# Altium PCB Air724UG_Air723UG.PcbDoc
Units mil, origin at the board's own origin, x right, y up, seen from the top; angles counter-clockwise.
Board outline 6000 x 4000 mil, 2 copper layers (Top, Bottom), stack 12.7 mil thick; 2 components, 0 nets, 234 pads, 0 vias.
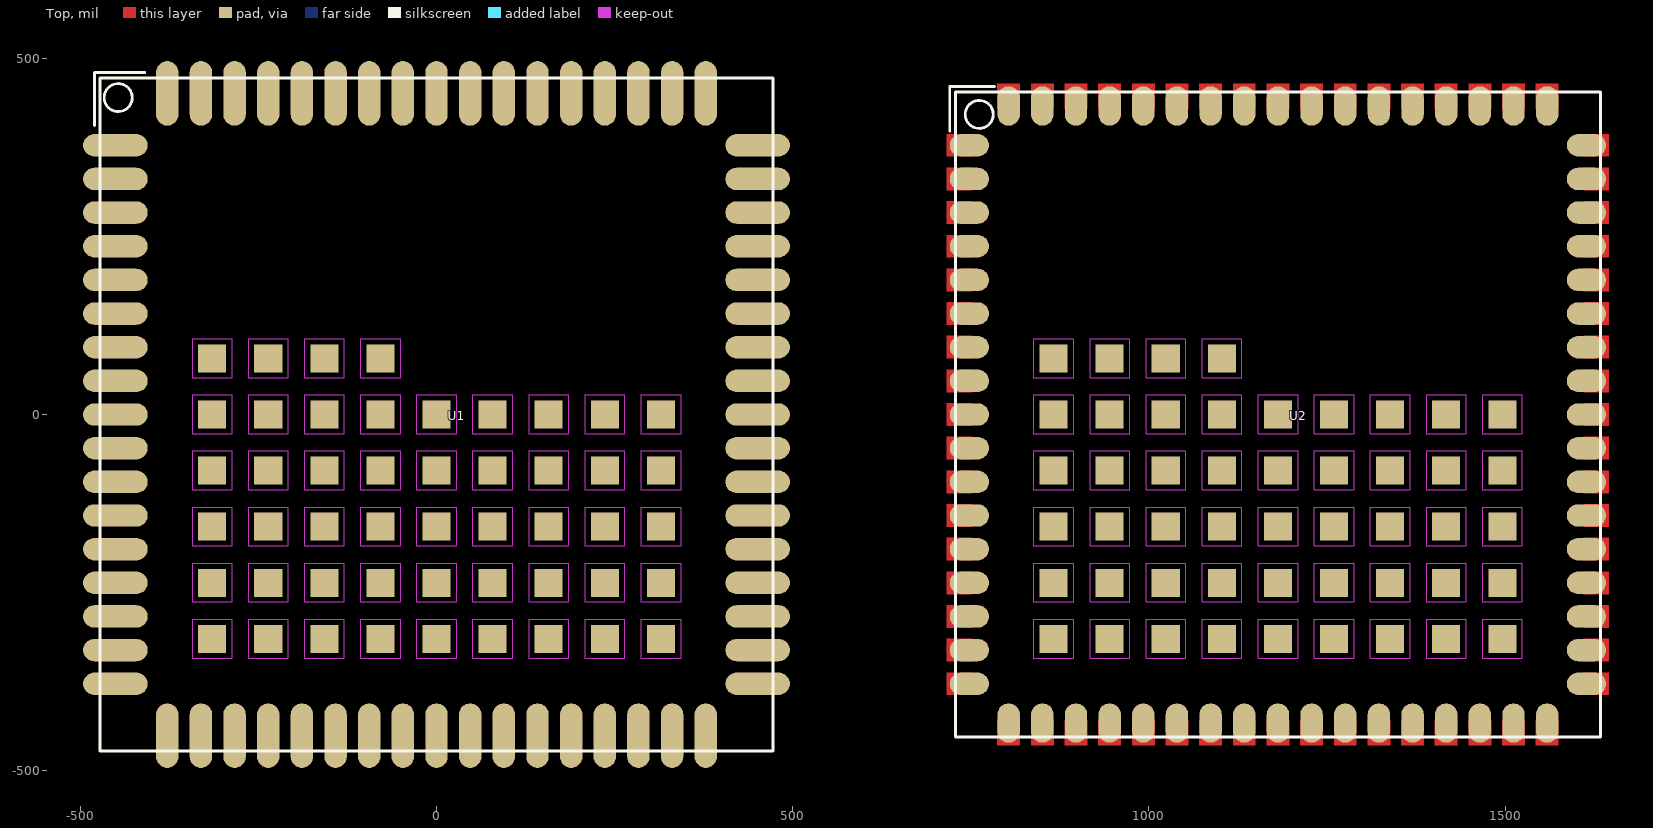
[diagram p0: Top view]
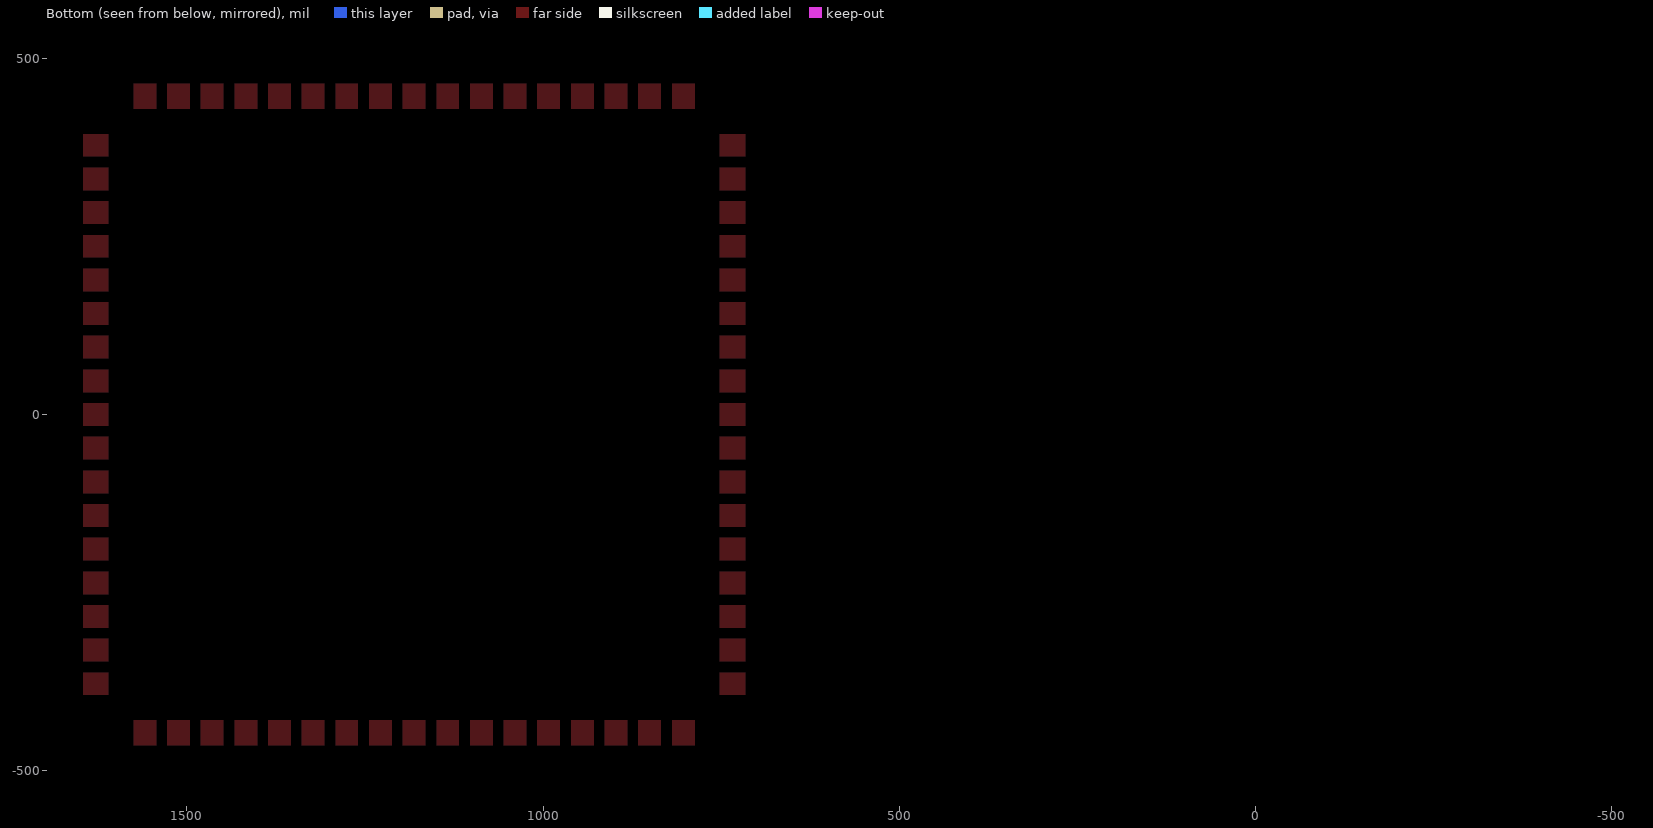
[diagram p1: Bottom view, seen from below]

## Layer stack, top to bottom
Solder Mask Top: solder mask 0.4, Solder Resist, Dk 3.5
Top: signal copper 1.35
Dielectric 1: dielectric 10, FR-4, Dk 4.3
Bottom: signal copper 1.35
Solder Mask Bottom: solder mask 0.4, Solder Resist, Dk 3.5

## Board outline
-9000,-9000 -3000,-9000 -3000,-5000 -9000,-5000

## Design rules (kind name [scope] priority, off if disabled: settings)
Clearance "Clearance - Default - DEFAULT- SMD" [IsVia vs IsSMTPin] p1: gap=6 ignorepadtopadclearanceinfootprint=FALSE
Clearance "Clearance - Default - DEFAULT - Via" [IsVia vs IsVia] p2: gap=6 ignorepadtopadclearanceinfootprint=FALSE
Clearance "Clearance - Default - DEFAULT - Net" [All] p3: gap=6 ignorepadtopadclearanceinfootprint=FALSE except(0: Arc-Hole Track-Hole SMDPad-Hole THPad-Hole Via-Hole Fill-Hole Poly-Hole Region-Hole Text-Hole; 10: Text-Text)
ComponentClearance "ComponentClearance - Default - DEFAULT" [All] p1: gap=6 collisioncheckmode=3 verticalgap=10 showdistances=FALSE
FanoutControl Fanout_Small [(CompPinCount < 5)] p3: bgadir=Out bgaviamode=Centered fanoutstyle=Auto fanoutdirection=OutThenIn viagrid=1 // Fanout_Small (Default Rule)
FanoutControl Fanout_SOIC [IsSOIC] p4: bgadir=Out bgaviamode=Centered fanoutstyle=Auto fanoutdirection=Alternating viagrid=1 // Fanout_SOIC (Default Rule)
HoleToHoleClearance "HoleToHoleClearance - Default - DEFAULT" [All] p1: gap=6 allowstackedmicrovias=TRUE
Length "Default Length" [All] p1: maxlimit=50000 minlimit=0 usedelayunits=FALSE
MaxMinImpedance "Default Impedance" [All] p1: minimum=50.00 maximum=150.0
ParallelSegment "Default Parallel Segment Adjasent" [All] p1: limit=1000 gap=200
ParallelSegment "Default Parallel Segment Same Layer" [All] p2: limit=1000 gap=200
PlaneConnect "Default PlaneConnect" [All] p1: planeconnectstyle=Relief reliefexpansion=20 reliefentries=4 reliefconductorwidth=15 reliefairgap=10
PolygonConnect "PolygonConnect - Default SMT" [IsSMTPin] p1: connectstyle=Relief reliefconductorwidth=10 reliefentries=4 polygonreliefangle="45 Angle" airgapwidth=10
PolygonConnect "PolygonConnect - Default Pad" [All] p2: connectstyle=Relief reliefconductorwidth=15 reliefentries=4 polygonreliefangle="45 Angle" airgapwidth=10
RoutingLayers "RoutingLayers - Default - DEFAULT" [All] p1: top layer_v5=TRUE bottom layer_v5=TRUE
RoutingPriority "RoutingPriority - Default - DEFAULT" [All] p1: routingpriority=3
RoutingTopology "Default Routing Topology" [All] p1: topology=Shortest
RoutingVias "RoutingVias - Default - DEFAULT" [All] p1: holewidth=37 width=55 viastyle="Through Hole" minholewidth=37 minwidth=55 maxholewidth=37 maxwidth=55
SMDToCorner "SMDToCorner - Default - DEFAULT" [All] p1: distance=60000
SolderMaskExpansion [All] p1: expansion=4
Width "Default Width" [All] p1: maxlimit=12 minlimit=12 preferedwidth=12
20 further rules are at their usual default settings.

## Components (designator, comment, footprint, x,y, rotation, side; value= is the part's Value field where it differs from the comment)
U1 "AIR724UG" AIR724UG 0,0 r0 top
U2 "AIR723UG" AIR723UG 1181.1,0 r0 top

## Footprints (in the part's own frame and the unit in brackets; to place one, negate y for a bottom-side part, rotate by r counter-clockwise, add the part's x,y. Pads: shape width x height; smd on the part's side, far side on the other; paste and mask are expansions set on the pad)
AIR723UG [mm]
  oval 1.4x0.8 smd: 1(-11,9.6) 2(-11,8.4) 3(-11,7.2) 4(-11,6) 5(-11,4.8) 6(-11,3.6) 7(-11,2.4) 8(-11,1.2) 9(-11,0) 10(-11,-1.2) 11(-11,-2.4) 12(-11,-3.6) 13(-11,-4.8) 14(-11,-6) 15(-11,-7.2) 16(-11,-8.4) 17(-11,-9.6) 35(11,-9.6) 36(11,-8.4) 37(11,-7.2) 38(11,-6) 39(11,-4.8) 40(11,-3.6) 41(11,-2.4) 42(11,-1.2) 43(11,0) 44(11,1.2) 45(11,2.4) 46(11,3.6) 47(11,4.8) 48(11,6) 49(11,7.2) 50(11,8.4) 51(11,9.6)
  oval 0.8x1.4 smd: 18(-9.6,-11) 19(-8.4,-11) 20(-7.2,-11) 21(-6,-11) 22(-4.8,-11) 23(-3.6,-11) 24(-2.4,-11) 25(-1.2,-11) 26(0,-11) 27(1.2,-11) 28(2.4,-11) 29(3.6,-11) 30(4.8,-11) 31(6,-11) 32(7.2,-11) 33(8.4,-11) 34(9.6,-11) 52(9.6,11) 53(8.4,11) 54(7.2,11) 55(6,11) 56(4.8,11) 57(3.6,11) 58(2.4,11) 59(1.2,11) 60(0,11) 61(-1.2,11) 62(-2.4,11) 63(-3.6,11) 64(-4.8,11) 65(-6,11) 66(-7.2,11) 67(-8.4,11) 68(-9.6,11)
  rect 1x1 smd: 69(-8,2) 70(-6,2) 71(-4,2) 72(-2,2) 73(-8,0) 74(-6,0) 75(-4,0) 76(-2,0) 77(0,0) 78(2,0) 79(4,0) 80(6,0) 81(8,0) 82(-8,-2) 83(-6,-2) 84(-4,-2) 85(-2,-2) 86(0,-2) 87(2,-2) 88(4,-2) 89(6,-2) 90(8,-2) 91(-8,-4) 92(-6,-4) 93(-4,-4) 94(-2,-4) 95(0,-4) 96(2,-4) 97(4,-4) 98(6,-4) 99(8,-4) 100(-8,-6) 101(-6,-6) 102(-4,-6) 103(-2,-6) 104(0,-6) 105(2,-6) 106(4,-6) 107(6,-6) 108(8,-6) 109(-8,-8) 110(-6,-8) 111(-4,-8) 112(-2,-8) 113(0,-8) 114(2,-8) 115(4,-8) 116(6,-8) 117(8,-8)
  Top region: -10,10.9 -10,11.8 -9.2,11.8 -9.2,10.9 -10,10.9
  Top region: -8.8,10.9 -8.8,11.8 -8,11.8 -8,10.9 -8.8,10.9
  Top region: -7.6,10.9 -7.6,11.8 -6.8,11.8 -6.8,10.9 -7.6,10.9
  Top region: -6.4,10.9 -6.4,11.8 -5.6,11.8 -5.6,10.9 -6.4,10.9
  Top region: -5.2,10.9 -5.2,11.8 -4.4,11.8 -4.4,10.9 -5.2,10.9
  Top region: -4,10.9 -4,11.8 -3.2,11.8 -3.2,10.9 -4,10.9
  Top region: -2.8,10.9 -2.8,11.8 -2,11.8 -2,10.9 -2.8,10.9
  Top region: -1.6,10.9 -1.6,11.8 -0.8,11.8 -0.8,10.9 -1.6,10.9
  Top region: -0.4,10.9 -0.4,11.8 0.4,11.8 0.4,10.9 -0.4,10.9
  Top region: 0.8,10.9 0.8,11.8 1.6,11.8 1.6,10.9 0.8,10.9
  Top region: 2,10.9 2,11.8 2.8,11.8 2.8,10.9 2,10.9
  Top region: 3.2,10.9 3.2,11.8 4,11.8 4,10.9 3.2,10.9
  Top region: 4.4,10.9 4.4,11.8 5.2,11.8 5.2,10.9 4.4,10.9
  Top region: 5.6,10.9 5.6,11.8 6.4,11.8 6.4,10.9 5.6,10.9
  Top region: 6.8,10.9 6.8,11.8 7.6,11.8 7.6,10.9 6.8,10.9
  Top region: 8,10.9 8,11.8 8.8,11.8 8.8,10.9 8,10.9
  Top region: 9.2,10.9 9.2,11.8 10,11.8 10,10.9 9.2,10.9
  Top region: 10.9,10 11.8,10 11.8,9.2 10.9,9.2 10.9,10
  Top region: 10.9,8.8 11.8,8.8 11.8,8 10.9,8 10.9,8.8
  Top region: 10.9,7.6 11.8,7.6 11.8,6.8 10.9,6.8 10.9,7.6
  Top region: 10.9,6.4 11.8,6.4 11.8,5.6 10.9,5.6 10.9,6.4
  Top region: 10.9,5.2 11.8,5.2 11.8,4.4 10.9,4.4 10.9,5.2
  Top region: 10.9,4 11.8,4 11.8,3.2 10.9,3.2 10.9,4
  Top region: 10.9,2.8 11.8,2.8 11.8,2 10.9,2 10.9,2.8
  Top region: 10.9,1.6 11.8,1.6 11.8,0.8 10.9,0.8 10.9,1.6
  Top region: 10.9,0.4 11.8,0.4 11.8,-0.4 10.9,-0.4 10.9,0.4
  Top region: 10.9,-0.8 11.8,-0.8 11.8,-1.6 10.9,-1.6 10.9,-0.8
  Top region: 10.9,-2 11.8,-2 11.8,-2.8 10.9,-2.8 10.9,-2
  Top region: 10.9,-3.2 11.8,-3.2 11.8,-4 10.9,-4 10.9,-3.2
  Top region: 10.9,-4.4 11.8,-4.4 11.8,-5.2 10.9,-5.2 10.9,-4.4
  Top region: 10.9,-5.6 11.8,-5.6 11.8,-6.4 10.9,-6.4 10.9,-5.6
  Top region: 10.9,-6.8 11.8,-6.8 11.8,-7.6 10.9,-7.6 10.9,-6.8
  Top region: 10.9,-8 11.8,-8 11.8,-8.8 10.9,-8.8 10.9,-8
  Top region: 10.9,-9.2 11.8,-9.2 11.8,-10 10.9,-10 10.9,-9.2
  Top region: 9.2,-11.8 9.2,-10.9 10,-10.9 10,-11.8 9.2,-11.8
  Top region: 8,-11.8 8,-10.9 8.8,-10.9 8.8,-11.8 8,-11.8
  Top region: 6.8,-11.8 6.8,-10.9 7.6,-10.9 7.6,-11.8 6.8,-11.8
  Top region: 5.6,-11.8 5.6,-10.9 6.4,-10.9 6.4,-11.8 5.6,-11.8
  Top region: 4.4,-11.8 4.4,-10.9 5.2,-10.9 5.2,-11.8 4.4,-11.8
  Top region: 3.2,-11.8 3.2,-10.9 4,-10.9 4,-11.8 3.2,-11.8
  Top region: 2,-11.8 2,-10.9 2.8,-10.9 2.8,-11.8 2,-11.8
  Top region: 0.8,-11.8 0.8,-10.9 1.6,-10.9 1.6,-11.8 0.8,-11.8
  Top region: -0.4,-11.8 -0.4,-10.9 0.4,-10.9 0.4,-11.8 -0.4,-11.8
  Top region: -1.6,-11.8 -1.6,-10.9 -0.8,-10.9 -0.8,-11.8 -1.6,-11.8
  Top region: -2.8,-11.8 -2.8,-10.9 -2,-10.9 -2,-11.8 -2.8,-11.8
  Top region: -4,-11.8 -4,-10.9 -3.2,-10.9 -3.2,-11.8 -4,-11.8
  Top region: -5.2,-11.8 -5.2,-10.9 -4.4,-10.9 -4.4,-11.8 -5.2,-11.8
  Top region: -6.4,-11.8 -6.4,-10.9 -5.6,-10.9 -5.6,-11.8 -6.4,-11.8
  Top region: -7.6,-11.8 -7.6,-10.9 -6.8,-10.9 -6.8,-11.8 -7.6,-11.8
  Top region: -8.8,-11.8 -8.8,-10.9 -8,-10.9 -8,-11.8 -8.8,-11.8
  Top region: -10,-11.8 -10,-10.9 -9.2,-10.9 -9.2,-11.8 -10,-11.8
  Top region: -11.8,-9.2 -10.9,-9.2 -10.9,-10 -11.8,-10 -11.8,-9.2
  Top region: -11.8,-8 -10.9,-8 -10.9,-8.8 -11.8,-8.8 -11.8,-8
  Top region: -11.8,-6.8 -10.9,-6.8 -10.9,-7.6 -11.8,-7.6 -11.8,-6.8
  Top region: -11.8,-5.6 -10.9,-5.6 -10.9,-6.4 -11.8,-6.4 -11.8,-5.6
  Top region: -11.8,-4.4 -10.9,-4.4 -10.9,-5.2 -11.8,-5.2 -11.8,-4.4
  Top region: -11.8,-3.2 -10.9,-3.2 -10.9,-4 -11.8,-4 -11.8,-3.2
  Top region: -11.8,-2 -10.9,-2 -10.9,-2.8 -11.8,-2.8 -11.8,-2
  Top region: -11.8,-0.8 -10.9,-0.8 -10.9,-1.6 -11.8,-1.6 -11.8,-0.8
  Top region: -11.8,0.4 -10.9,0.4 -10.9,-0.4 -11.8,-0.4 -11.8,0.4
  Top region: -11.8,1.6 -10.9,1.6 -10.9,0.8 -11.8,0.8 -11.8,1.6
  Top region: -11.8,2.8 -10.9,2.8 -10.9,2 -11.8,2 -11.8,2.8
  Top region: -11.8,4 -10.9,4 -10.9,3.2 -11.8,3.2 -11.8,4
  Top region: -11.8,5.2 -10.9,5.2 -10.9,4.4 -11.8,4.4 -11.8,5.2
  Top region: -11.8,6.4 -10.9,6.4 -10.9,5.6 -11.8,5.6 -11.8,6.4
  Top region: -11.8,7.6 -10.9,7.6 -10.9,6.8 -11.8,6.8 -11.8,7.6
  Top region: -11.8,8.8 -10.9,8.8 -10.9,8 -11.8,8 -11.8,8.8
  Top region: -11.8,10 -10.9,10 -10.9,9.2 -11.8,9.2 -11.8,10
  Top keep-out region: 7.3,-3.3 8.7,-3.3 8.7,-4.7 7.3,-4.7 7.3,-3.3
  Top keep-out region: -8.7,-7.3 -7.3,-7.3 -7.3,-8.7 -8.7,-8.7 -8.7,-7.3
  Top keep-out region: -8.7,-5.3 -7.3,-5.3 -7.3,-6.7 -8.7,-6.7 -8.7,-5.3
  Top keep-out region: 7.3,-7.3 8.7,-7.3 8.7,-8.7 7.3,-8.7 7.3,-7.3
  Top keep-out region: 7.3,-5.3 8.7,-5.3 8.7,-6.7 7.3,-6.7 7.3,-5.3
  Top keep-out region: 5.3,-7.3 6.7,-7.3 6.7,-8.7 5.3,-8.7 5.3,-7.3
  Top keep-out region: 5.3,-5.3 6.7,-5.3 6.7,-6.7 5.3,-6.7 5.3,-5.3
  Top keep-out region: 7.3,-1.3 8.7,-1.3 8.7,-2.7 7.3,-2.7 7.3,-1.3
  Top keep-out region: 7.3,0.7 8.7,0.7 8.7,-0.7 7.3,-0.7 7.3,0.7
  Top keep-out region: 5.3,-1.3 6.7,-1.3 6.7,-2.7 5.3,-2.7 5.3,-1.3
  Top keep-out region: 5.3,0.7 6.7,0.7 6.7,-0.7 5.3,-0.7 5.3,0.7
  Top keep-out region: 3.3,-1.3 4.7,-1.3 4.7,-2.7 3.3,-2.7 3.3,-1.3
  Top keep-out region: 3.3,0.7 4.7,0.7 4.7,-0.7 3.3,-0.7 3.3,0.7
  Top keep-out region: 1.3,-1.3 2.7,-1.3 2.7,-2.7 1.3,-2.7 1.3,-1.3
  Top keep-out region: 1.3,0.7 2.7,0.7 2.7,-0.7 1.3,-0.7 1.3,0.7
  Top keep-out region: -0.7,-1.3 0.7,-1.3 0.7,-2.7 -0.7,-2.7 -0.7,-1.3
  Top keep-out region: -0.7,0.7 0.7,0.7 0.7,-0.7 -0.7,-0.7 -0.7,0.7
  Top keep-out region: -8.7,2.7 -7.3,2.7 -7.3,1.3 -8.7,1.3 -8.7,2.7
  Top keep-out region: -8.7,0.7 -7.3,0.7 -7.3,-0.7 -8.7,-0.7 -8.7,0.7
  Top keep-out region: -6.7,2.7 -5.3,2.7 -5.3,1.3 -6.7,1.3 -6.7,2.7
  Top keep-out region: -6.7,0.7 -5.3,0.7 -5.3,-0.7 -6.7,-0.7 -6.7,0.7
  Top keep-out region: -4.7,2.7 -3.3,2.7 -3.3,1.3 -4.7,1.3 -4.7,2.7
  Top keep-out region: -4.7,0.7 -3.3,0.7 -3.3,-0.7 -4.7,-0.7 -4.7,0.7
  Top keep-out region: -8.7,-3.3 -7.3,-3.3 -7.3,-4.7 -8.7,-4.7 -8.7,-3.3
  Top keep-out region: -6.7,-3.3 -5.3,-3.3 -5.3,-4.7 -6.7,-4.7 -6.7,-3.3
  Top keep-out region: -4.7,-3.3 -3.3,-3.3 -3.3,-4.7 -4.7,-4.7 -4.7,-3.3
  Top keep-out region: -8.7,-1.3 -7.3,-1.3 -7.3,-2.7 -8.7,-2.7 -8.7,-1.3
  Top keep-out region: -6.7,-1.3 -5.3,-1.3 -5.3,-2.7 -6.7,-2.7 -6.7,-1.3
  Top keep-out region: -4.7,-1.3 -3.3,-1.3 -3.3,-2.7 -4.7,-2.7 -4.7,-1.3
  Top keep-out region: 5.3,-3.3 6.7,-3.3 6.7,-4.7 5.3,-4.7 5.3,-3.3
  Top keep-out region: 3.3,-3.3 4.7,-3.3 4.7,-4.7 3.3,-4.7 3.3,-3.3
  Top keep-out region: 1.3,-3.3 2.7,-3.3 2.7,-4.7 1.3,-4.7 1.3,-3.3
  Top keep-out region: -0.7,-3.3 0.7,-3.3 0.7,-4.7 -0.7,-4.7 -0.7,-3.3
  Top keep-out region: -2.7,2.7 -1.3,2.7 -1.3,1.3 -2.7,1.3 -2.7,2.7
  Top keep-out region: -2.7,0.7 -1.3,0.7 -1.3,-0.7 -2.7,-0.7 -2.7,0.7
  Top keep-out region: -2.7,-1.3 -1.3,-1.3 -1.3,-2.7 -2.7,-2.7 -2.7,-1.3
  Top keep-out region: -2.7,-3.3 -1.3,-3.3 -1.3,-4.7 -2.7,-4.7 -2.7,-3.3
  Top keep-out region: -6.7,-7.3 -5.3,-7.3 -5.3,-8.7 -6.7,-8.7 -6.7,-7.3
  Top keep-out region: -4.7,-7.3 -3.3,-7.3 -3.3,-8.7 -4.7,-8.7 -4.7,-7.3
  Top keep-out region: -2.7,-7.3 -1.3,-7.3 -1.3,-8.7 -2.7,-8.7 -2.7,-7.3
  Top keep-out region: -0.7,-7.3 0.7,-7.3 0.7,-8.7 -0.7,-8.7 -0.7,-7.3
  Top keep-out region: 1.3,-7.3 2.7,-7.3 2.7,-8.7 1.3,-8.7 1.3,-7.3
  Top keep-out region: 3.3,-7.3 4.7,-7.3 4.7,-8.7 3.3,-8.7 3.3,-7.3
  Top keep-out region: 3.3,-5.3 4.7,-5.3 4.7,-6.7 3.3,-6.7 3.3,-5.3
  Top keep-out region: 1.3,-5.3 2.7,-5.3 2.7,-6.7 1.3,-6.7 1.3,-5.3
  Top keep-out region: -0.7,-5.3 0.7,-5.3 0.7,-6.7 -0.7,-6.7 -0.7,-5.3
  Top keep-out region: -2.7,-5.3 -1.3,-5.3 -1.3,-6.7 -2.7,-6.7 -2.7,-5.3
  Top keep-out region: -4.7,-5.3 -3.3,-5.3 -3.3,-6.7 -4.7,-6.7 -4.7,-5.3
  Top keep-out region: -6.7,-5.3 -5.3,-5.3 -5.3,-6.7 -6.7,-6.7 -6.7,-5.3
  silkscreen extent -11.7,-11.5 11.5,11.7
AIR724UG [mm]
  oval 2.3x0.8 smd: 1(-11.45,9.6) 2(-11.45,8.4) 3(-11.45,7.2) 4(-11.45,6) 5(-11.45,4.8) 6(-11.45,3.6) 7(-11.45,2.4) 8(-11.45,1.2) 9(-11.45,0) 10(-11.45,-1.2) 11(-11.45,-2.4) 12(-11.45,-3.6) 13(-11.45,-4.8) 14(-11.45,-6) 15(-11.45,-7.2) 16(-11.45,-8.4) 17(-11.45,-9.6) 35(11.45,-9.6) 36(11.45,-8.4) 37(11.45,-7.2) 38(11.45,-6) 39(11.45,-4.8) 40(11.45,-3.6) 41(11.45,-2.4) 42(11.45,-1.2) 43(11.45,0) 44(11.45,1.2) 45(11.45,2.4) 46(11.45,3.6) 47(11.45,4.8) 48(11.45,6) 49(11.45,7.2) 50(11.45,8.4) 51(11.45,9.6)
  oval 0.8x2.3 smd: 18(-9.6,-11.45) 19(-8.4,-11.45) 20(-7.2,-11.45) 21(-6,-11.45) 22(-4.8,-11.45) 23(-3.6,-11.45) 24(-2.4,-11.45) 25(-1.2,-11.45) 26(0,-11.45) 27(1.2,-11.45) 28(2.4,-11.45) 29(3.6,-11.45) 30(4.8,-11.45) 31(6,-11.45) 32(7.2,-11.45) 33(8.4,-11.45) 34(9.6,-11.45) 52(9.6,11.45) 53(8.4,11.45) 54(7.2,11.45) 55(6,11.45) 56(4.8,11.45) 57(3.6,11.45) 58(2.4,11.45) 59(1.2,11.45) 60(0,11.45) 61(-1.2,11.45) 62(-2.4,11.45) 63(-3.6,11.45) 64(-4.8,11.45) 65(-6,11.45) 66(-7.2,11.45) 67(-8.4,11.45) 68(-9.6,11.45)
  rect 1x1 smd: 69(-8,2) 70(-6,2) 71(-4,2) 72(-2,2) 73(-8,0) 74(-6,0) 75(-4,0) 76(-2,0) 77(0,0) 78(2,0) 79(4,0) 80(6,0) 81(8,0) 82(-8,-2) 83(-6,-2) 84(-4,-2) 85(-2,-2) 86(0,-2) 87(2,-2) 88(4,-2) 89(6,-2) 90(8,-2) 91(-8,-4) 92(-6,-4) 93(-4,-4) 94(-2,-4) 95(0,-4) 96(2,-4) 97(4,-4) 98(6,-4) 99(8,-4) 100(-8,-6) 101(-6,-6) 102(-4,-6) 103(-2,-6) 104(0,-6) 105(2,-6) 106(4,-6) 107(6,-6) 108(8,-6) 109(-8,-8) 110(-6,-8) 111(-4,-8) 112(-2,-8) 113(0,-8) 114(2,-8) 115(4,-8) 116(6,-8) 117(8,-8)
  Top keep-out region: 7.3,-3.3 8.7,-3.3 8.7,-4.7 7.3,-4.7 7.3,-3.3
  Top keep-out region: -8.7,-7.3 -7.3,-7.3 -7.3,-8.7 -8.7,-8.7 -8.7,-7.3
  Top keep-out region: -8.7,-5.3 -7.3,-5.3 -7.3,-6.7 -8.7,-6.7 -8.7,-5.3
  Top keep-out region: 7.3,-7.3 8.7,-7.3 8.7,-8.7 7.3,-8.7 7.3,-7.3
  Top keep-out region: 7.3,-5.3 8.7,-5.3 8.7,-6.7 7.3,-6.7 7.3,-5.3
  Top keep-out region: 5.3,-7.3 6.7,-7.3 6.7,-8.7 5.3,-8.7 5.3,-7.3
  Top keep-out region: 5.3,-5.3 6.7,-5.3 6.7,-6.7 5.3,-6.7 5.3,-5.3
  Top keep-out region: 7.3,-1.3 8.7,-1.3 8.7,-2.7 7.3,-2.7 7.3,-1.3
  Top keep-out region: 7.3,0.7 8.7,0.7 8.7,-0.7 7.3,-0.7 7.3,0.7
  Top keep-out region: 5.3,-1.3 6.7,-1.3 6.7,-2.7 5.3,-2.7 5.3,-1.3
  Top keep-out region: 5.3,0.7 6.7,0.7 6.7,-0.7 5.3,-0.7 5.3,0.7
  Top keep-out region: 3.3,-1.3 4.7,-1.3 4.7,-2.7 3.3,-2.7 3.3,-1.3
  Top keep-out region: 3.3,0.7 4.7,0.7 4.7,-0.7 3.3,-0.7 3.3,0.7
  Top keep-out region: 1.3,-1.3 2.7,-1.3 2.7,-2.7 1.3,-2.7 1.3,-1.3
  Top keep-out region: 1.3,0.7 2.7,0.7 2.7,-0.7 1.3,-0.7 1.3,0.7
  Top keep-out region: -0.7,-1.3 0.7,-1.3 0.7,-2.7 -0.7,-2.7 -0.7,-1.3
  Top keep-out region: -0.7,0.7 0.7,0.7 0.7,-0.7 -0.7,-0.7 -0.7,0.7
  Top keep-out region: -8.7,2.7 -7.3,2.7 -7.3,1.3 -8.7,1.3 -8.7,2.7
  Top keep-out region: -8.7,0.7 -7.3,0.7 -7.3,-0.7 -8.7,-0.7 -8.7,0.7
  Top keep-out region: -6.7,2.7 -5.3,2.7 -5.3,1.3 -6.7,1.3 -6.7,2.7
  Top keep-out region: -6.7,0.7 -5.3,0.7 -5.3,-0.7 -6.7,-0.7 -6.7,0.7
  Top keep-out region: -4.7,2.7 -3.3,2.7 -3.3,1.3 -4.7,1.3 -4.7,2.7
  Top keep-out region: -4.7,0.7 -3.3,0.7 -3.3,-0.7 -4.7,-0.7 -4.7,0.7
  Top keep-out region: -8.7,-3.3 -7.3,-3.3 -7.3,-4.7 -8.7,-4.7 -8.7,-3.3
  Top keep-out region: -6.7,-3.3 -5.3,-3.3 -5.3,-4.7 -6.7,-4.7 -6.7,-3.3
  Top keep-out region: -4.7,-3.3 -3.3,-3.3 -3.3,-4.7 -4.7,-4.7 -4.7,-3.3
  Top keep-out region: -8.7,-1.3 -7.3,-1.3 -7.3,-2.7 -8.7,-2.7 -8.7,-1.3
  Top keep-out region: -6.7,-1.3 -5.3,-1.3 -5.3,-2.7 -6.7,-2.7 -6.7,-1.3
  Top keep-out region: -4.7,-1.3 -3.3,-1.3 -3.3,-2.7 -4.7,-2.7 -4.7,-1.3
  Top keep-out region: 5.3,-3.3 6.7,-3.3 6.7,-4.7 5.3,-4.7 5.3,-3.3
  Top keep-out region: 3.3,-3.3 4.7,-3.3 4.7,-4.7 3.3,-4.7 3.3,-3.3
  Top keep-out region: 1.3,-3.3 2.7,-3.3 2.7,-4.7 1.3,-4.7 1.3,-3.3
  Top keep-out region: -0.7,-3.3 0.7,-3.3 0.7,-4.7 -0.7,-4.7 -0.7,-3.3
  Top keep-out region: -2.7,2.7 -1.3,2.7 -1.3,1.3 -2.7,1.3 -2.7,2.7
  Top keep-out region: -2.7,0.7 -1.3,0.7 -1.3,-0.7 -2.7,-0.7 -2.7,0.7
  Top keep-out region: -2.7,-1.3 -1.3,-1.3 -1.3,-2.7 -2.7,-2.7 -2.7,-1.3
  Top keep-out region: -2.7,-3.3 -1.3,-3.3 -1.3,-4.7 -2.7,-4.7 -2.7,-3.3
  Top keep-out region: -6.7,-7.3 -5.3,-7.3 -5.3,-8.7 -6.7,-8.7 -6.7,-7.3
  Top keep-out region: -4.7,-7.3 -3.3,-7.3 -3.3,-8.7 -4.7,-8.7 -4.7,-7.3
  Top keep-out region: -2.7,-7.3 -1.3,-7.3 -1.3,-8.7 -2.7,-8.7 -2.7,-7.3
  Top keep-out region: -0.7,-7.3 0.7,-7.3 0.7,-8.7 -0.7,-8.7 -0.7,-7.3
  Top keep-out region: 1.3,-7.3 2.7,-7.3 2.7,-8.7 1.3,-8.7 1.3,-7.3
  Top keep-out region: 3.3,-7.3 4.7,-7.3 4.7,-8.7 3.3,-8.7 3.3,-7.3
  Top keep-out region: 3.3,-5.3 4.7,-5.3 4.7,-6.7 3.3,-6.7 3.3,-5.3
  Top keep-out region: 1.3,-5.3 2.7,-5.3 2.7,-6.7 1.3,-6.7 1.3,-5.3
  Top keep-out region: -0.7,-5.3 0.7,-5.3 0.7,-6.7 -0.7,-6.7 -0.7,-5.3
  Top keep-out region: -2.7,-5.3 -1.3,-5.3 -1.3,-6.7 -2.7,-6.7 -2.7,-5.3
  Top keep-out region: -4.7,-5.3 -3.3,-5.3 -3.3,-6.7 -4.7,-6.7 -4.7,-5.3
  Top keep-out region: -6.7,-5.3 -5.3,-5.3 -5.3,-6.7 -6.7,-6.7 -6.7,-5.3
  silkscreen extent -12.2,-12 12,12.2

## Nets (pads, with @x,y where several pads share a name; then routed paths per layer and width w, separated by ;. In a path a pad name is that pad's centre, name@x,y a point inside that pad or via, vN(x,y) a via of type N, cw(c..) or ccw(c..) an arc to the next point about the centre after c; other vN are vias at no path point)
pads on no net: U1.1 U1.2 U1.3 U1.4 U1.5 U1.6 U1.7 U1.8 U1.9 U1.10 U1.11 U1.12 U1.13 U1.14 U1.15 U1.16 U1.17 U1.18 U1.19 U1.20 U1.21 U1.22 U1.23 U1.24 U1.25 U1.26 U1.27 U1.28 U1.29 U1.30 U1.31 U1.32 U1.33 U1.34 U1.35 U1.36 U1.37 U1.38 U1.39 U1.40 U1.41 U1.42 U1.43 U1.44 U1.45 U1.46 U1.47 U1.48 U1.49 U1.50 U1.51 U1.52 U1.53 U1.54 U1.55 U1.56 U1.57 U1.58 U1.59 U1.60 U1.61 U1.62 U1.63 U1.64 U1.65 U1.66 U1.67 U1.68 U1.69 U1.70 U1.71 U1.72 U1.73 U1.74 U1.75 U1.76 U1.77 U1.78 U1.79 U1.80 U1.81 U1.82 U1.83 U1.84 U1.85 U1.86 U1.87 U1.88 U1.89 U1.90 U1.91 U1.92 U1.93 U1.94 U1.95 U1.96 U1.97 U1.98 U1.99 U1.100 U1.101 U1.102 U1.103 U1.104 U1.105 U1.106 U1.107 U1.108 U1.109 U1.110 U1.111 U1.112 U1.113 U1.114 U1.115 U1.116 U1.117 U2.1 U2.2 U2.3 U2.4 U2.5 U2.6 U2.7 U2.8 U2.9 U2.10 U2.11 U2.12 U2.13 U2.14 U2.15 U2.16 U2.17 U2.18 U2.19 U2.20 U2.21 U2.22 U2.23 U2.24 U2.25 U2.26 U2.27 U2.28 U2.29 U2.30 U2.31 U2.32 U2.33 U2.34 U2.35 U2.36 U2.37 U2.38 U2.39 U2.40 U2.41 U2.42 U2.43 U2.44 U2.45 U2.46 U2.47 U2.48 U2.49 U2.50 U2.51 U2.52 U2.53 U2.54 U2.55 U2.56 U2.57 U2.58 U2.59 U2.60 U2.61 U2.62 U2.63 U2.64 U2.65 U2.66 U2.67 U2.68 U2.69 U2.70 U2.71 U2.72 U2.73 U2.74 U2.75 U2.76 U2.77 U2.78 U2.79 U2.80 U2.81 U2.82 U2.83 U2.84 U2.85 U2.86 U2.87 U2.88 U2.89 U2.90 U2.91 U2.92 U2.93 U2.94 U2.95 U2.96 U2.97 U2.98 U2.99 U2.100 U2.101 U2.102 U2.103 U2.104 U2.105 U2.106 U2.107 U2.108 U2.109 U2.110 U2.111 U2.112 U2.113 U2.114 U2.115 U2.116 U2.117